# EAGLE board untitled (EAGLE 9.6.2)
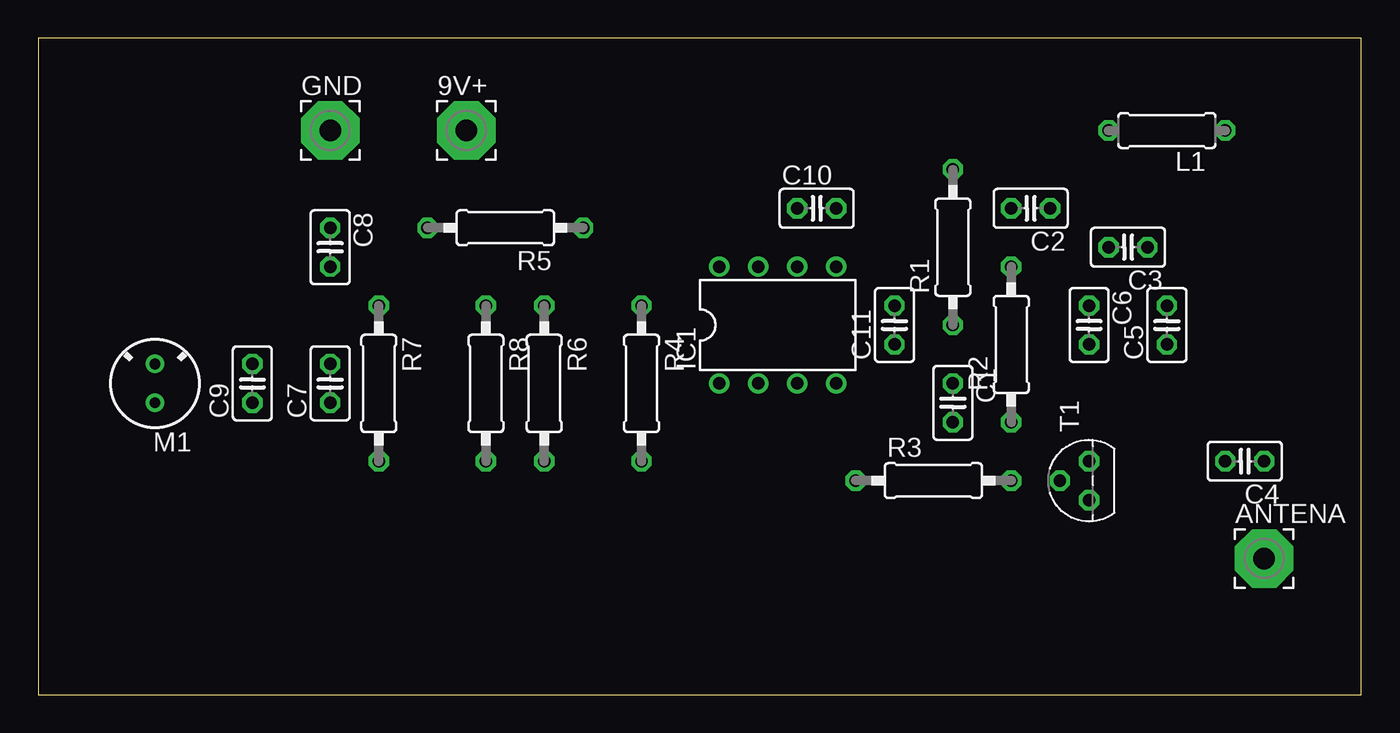
[diagram p0: board, top side]
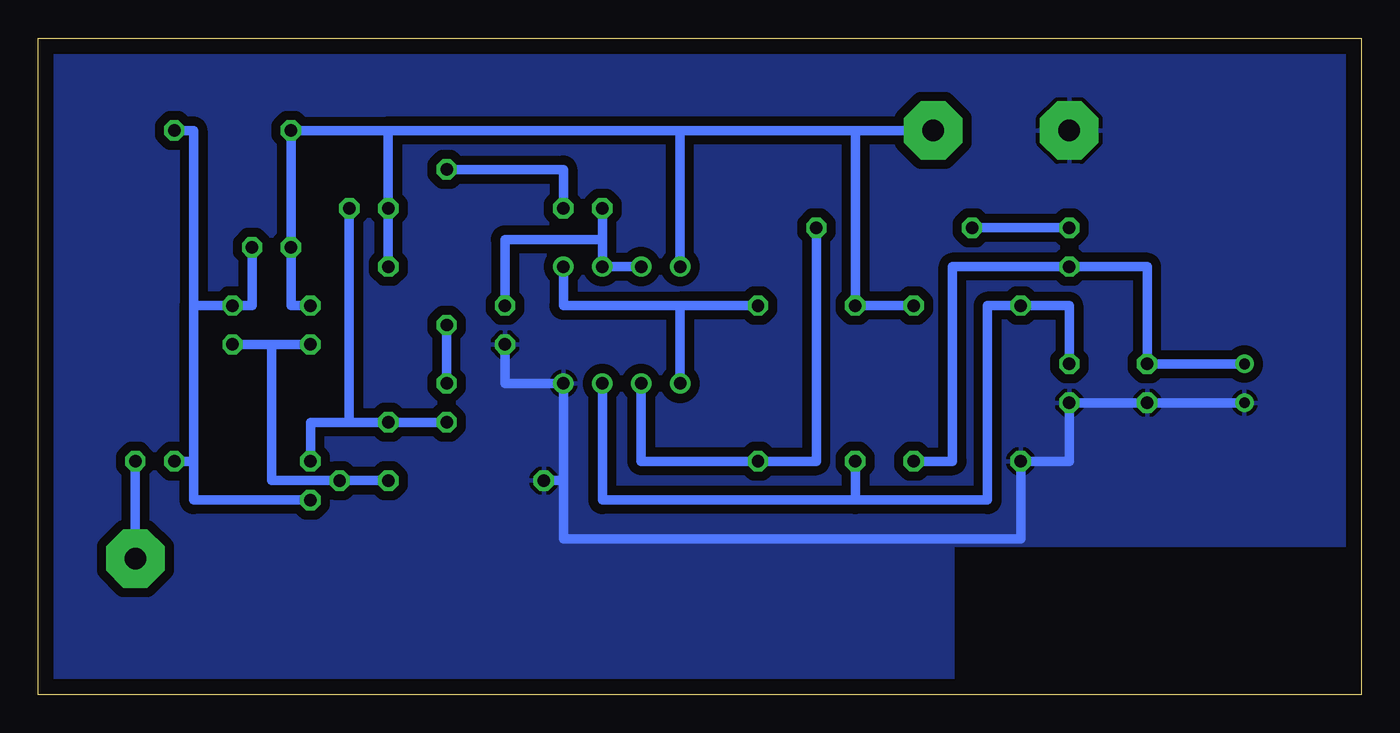
[diagram p1: board, bottom side, seen from below]

Size 86.34 x 42.85 mm. Coordinates in mm from the lower left corner, seen from the top.
Outline: 0,0 86.34,0 86.34,42.85 0,42.85 0,0
Copper layers (1*16): Top 0.035mm / dielectric 1.5mm / Bottom 0.035mm
Design rules "default": minimum track width 6mil, minimum drill 0.35mm, track to track 6mil, track to pad 6mil, pad to pad 6mil, via to via 6mil, smd to smd 6mil, copper to edge 40mil, drill to drill 6mil, minimum pad ring 10mil, minimum via ring 8mil, stop-mask expansion 4mil, vias tented up to drill 0mil, thermal gap 10mil

## Footprints (pad centres in the part's own frame; a part is rotated, then mirrored left to right if it is on the bottom)
3,81/1,4 = drill 1.397 pad 3.81 octagon: 1 0,0
C025-025X050 = drill 0.813 octagon: 1 -1.27,0; 2 1.27,0
DIL08 = drill 0.813 pad 1.27: 1 -3.81,-3.81; 2 -1.27,-3.81; 3 1.27,-3.81; 4 3.81,-3.81; 5 3.81,3.81; 6 1.27,3.81; 7 -1.27,3.81; 8 -3.81,3.81
0207/7 = drill 0.813 octagon: 1 -3.81,0; 2 3.81,0
F6050AP = drill 0.7 pad 1.2: 1 0,1.27; 2 0,-1.27
0207/10 = drill 0.813 octagon: 1 -5.08,0; 2 5.08,0
TO92 = drill 0.813 octagon: 1 1.27,0; 2 0,1.905; 3 -1.27,0

## Placement (x,y rotation side)
9V+  [3,81/1,4]  27.94,36.83 0 top
ANTENA  [3,81/1,4]  80.01,8.89 0 top
C1  47n  [C025-025X050]  59.69,19.05 270 top
C2  1n  [C025-025X050]  64.77,31.75 180 top
C3  39p  [C025-025X050]  71.12,29.21 180 top
C4  2p  [C025-025X050]  78.74,15.24 180 top
C5  5p  [C025-025X050]  73.66,24.13 90 top
C6  68p  [C025-025X050]  68.58,24.13 270 top
C7  1n  [C025-025X050]  19.05,20.32 90 top
C8  10u  [C025-025X050]  19.05,29.21 270 top
C9  1n  [C025-025X050]  13.97,20.32 90 top
C10  22u  [C025-025X050]  50.8,31.75 0 top
C11  1n  [C025-025X050]  55.88,24.13 90 top
GND  [3,81/1,4]  19.05,36.83 0 top
IC1  LM358N  [DIL08]  48.26,24.13 0 top
L1  [0207/7]  73.66,36.83 180 top
M1  ELECTRET_MICROPHON-F6050AP  [F6050AP]  7.62,20.32 180 top
R1  220  [0207/10]  59.69,29.21 90 top
R2  33k  [0207/10]  63.5,22.86 90 top
R3  150Ω  [0207/10]  58.42,13.97 0 top
R4  150k  [0207/10]  39.37,20.32 270 top
R5  300  [0207/10]  30.48,30.48 180 top
R6  4.7k  [0207/10]  33.02,20.32 270 top
R7  4.7  [0207/10]  22.23,20.32 270 top
R8  1.8k  [0207/10]  29.21,20.32 270 top
T1  BF199  [TO92]  68.58,13.97 90 top

## Library data of the parts
9V+ ANTENA GND = wirepad
C1-C11 = rcl; SPICEPREFIX: C
IC1 = linear
L1 = rcl; SPICEPREFIX: L
M1 = microphon
R1-R8 = rcl; SPICEPREFIX: R
T1 = transistor-npn

## Nets
GND: C7.1 C9.1 C11.1 GND.1 IC1.4 M1.1 R3.1 R7.2
N$1: C10.2 R1.2
N$2: C1.1 R1.1
N$3: C1.2 C2.1 R2.1 T1.1
N$4: C10.1 C11.2 IC1.6 IC1.7
N$5: C5.1 C6.2 R3.2 T1.2
N$6: C3.1 C4.2 C5.2 L1.1 T1.3
N$7: 9V+.1 C2.2 C3.2 C6.1 IC1.8 L1.2 R2.2 R6.1 R8.1
N$8: ANTENA.1 C4.1
N$9: IC1.1 IC1.5 R4.1
N$10: IC1.2 R4.2 R5.1
N$11: C7.2 IC1.3 R6.2 R7.1
N$13: C8.1 R5.2
N$14: C8.2 C9.2 M1.2 R8.2

## Tracks (layer width: path | path; a pad name or v marks a point on that pad's centre or on a via)
GND
  Bottom 0.61: 52.07,13.97 IC1.4 55.88,20.32 C11.1 | 52.07,13.97 52.07,10.16 22.23,10.16 R7.2 19.05,15.24 C7.1 C9.1 M1.1 | R3.1 52.07,13.97
  pour Bottom (isolate 0.61): -1.27,9.78 26.67,9.78 26.67,0 87.63,0 87.63,44.45 -1.27,44.45
N$1
  Bottom 0.61: R1.2 52.07,34.29 C10.2
N$2
  Bottom 0.61: C1.1 R1.1
N$3
  Bottom 0.61: T1.1 68.58,17.78 66.04,17.78 | C2.1 66.04,17.78 | C1.2 R2.1 66.04,17.78
N$4
  Bottom 0.61: 49.53,29.72 IC1.6 IC1.7 | 49.53,29.72 C10.1 | 49.53,29.72 55.88,29.72 C11.2
N$5
  Bottom 0.61: C6.2 71.12,22.86 | 71.12,22.86 C5.1 | R3.2 T1.2 71.12,13.97 71.12,22.86
N$6
  Bottom 0.61: C3.1 72.39,25.4 C5.2 76.2,25.4 | 76.2,15.24 76.2,12.7 T1.3 | 76.2,15.24 76.2,25.4 | L1.1 76.2,36.83 76.2,25.4 | C4.2 76.2,15.24
N$7
  Bottom 0.61: IC1.8 44.45,36.83 | 33.02,36.83 44.45,36.83 | 33.02,36.83 R6.1 R8.1 | 44.45,36.83 63.5,36.83 | 63.5,36.83 C2.2 R2.2 | C6.1 69.85,25.4 C3.2 L1.2 63.5,36.83 | 9V+.1 33.02,36.83
N$8
  Bottom 0.61: C4.1 ANTENA.1
N$9
  Bottom 0.61: IC1.5 52.07,25.4 44.45,25.4 | 44.45,25.4 IC1.1 | R4.1 44.45,25.4
N$10
  Bottom 0.61: IC1.2 46.99,15.24 R4.2 35.56,15.24 R5.1
N$11
  Bottom 0.61: C7.2 19.05,25.4 R7.1 24.38,25.4 24.38,12.7 33.02,12.7 | R6.2 33.02,12.7 | 33.02,12.7 49.53,12.7 IC1.3
N$13
  Bottom 0.61: R5.2 C8.1
N$14
  Bottom 0.61: R8.2 26.67,15.24 26.67,27.94 C8.2 13.97,27.94 C9.2 M1.2

## Text on the board
centerDrill: "Siódemka" / Mateusz Kitliński